# Altium PCB DingDong.PcbDoc
Units mil, origin at the board's own origin, x right, y up, seen from the top; angles counter-clockwise.
Board outline 1550 x 1690 mil, 2 copper layers (Top Layer, Bottom Layer); 15 components, 12 nets, 42 pads, 0 vias.
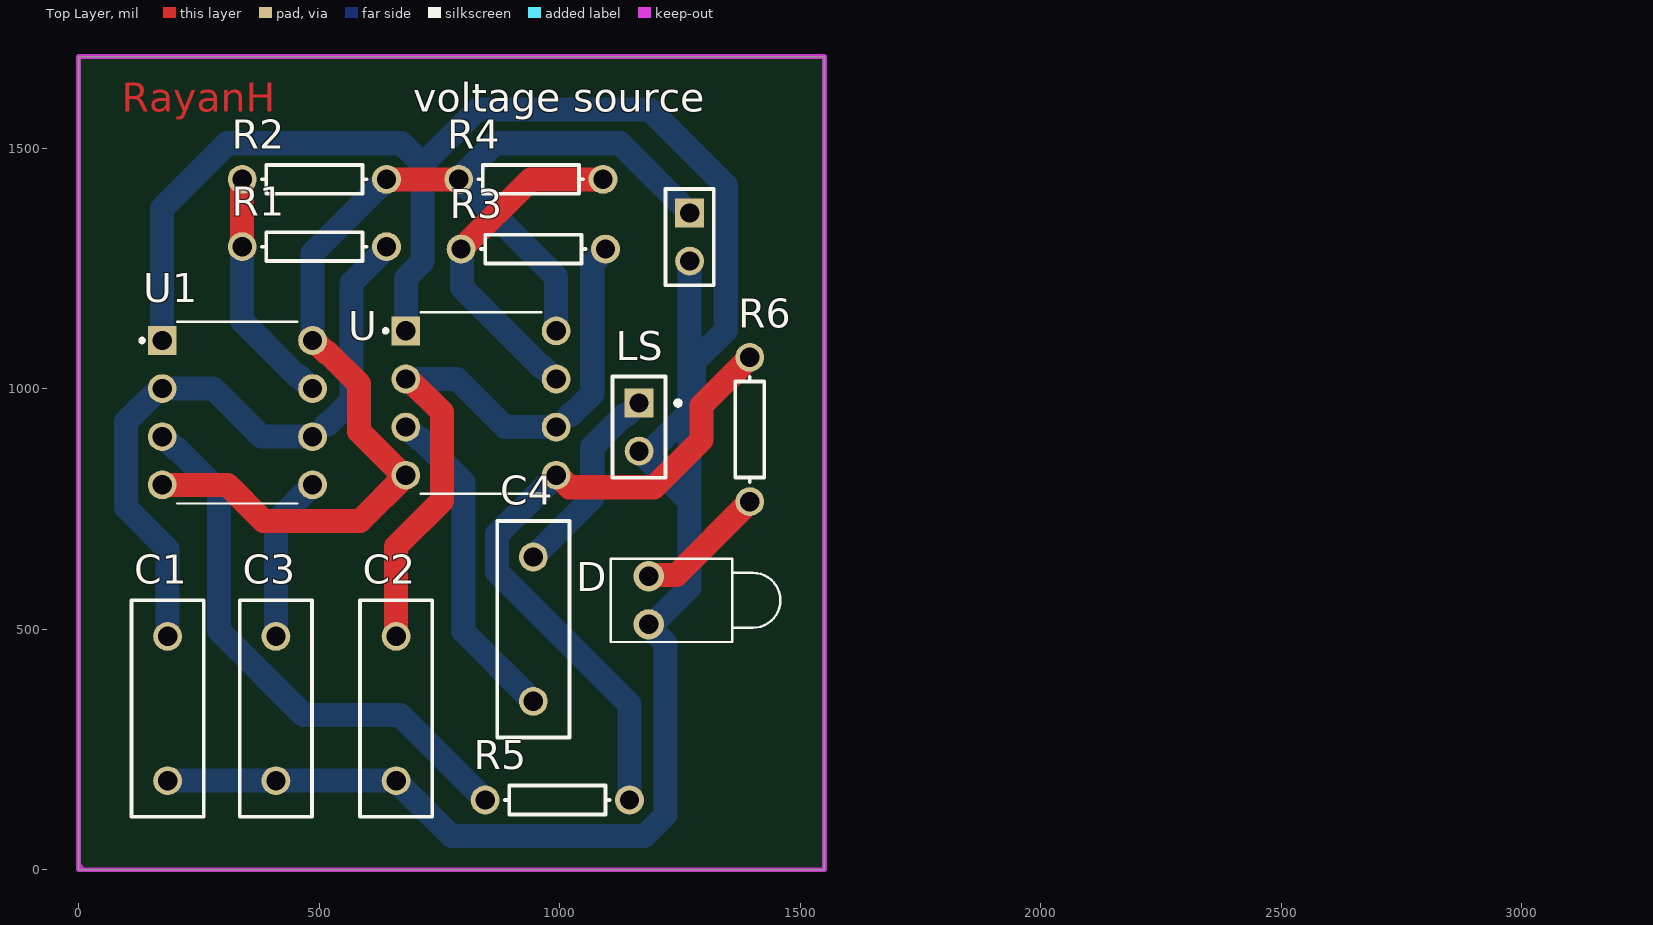
[diagram p0: Top Layer view]
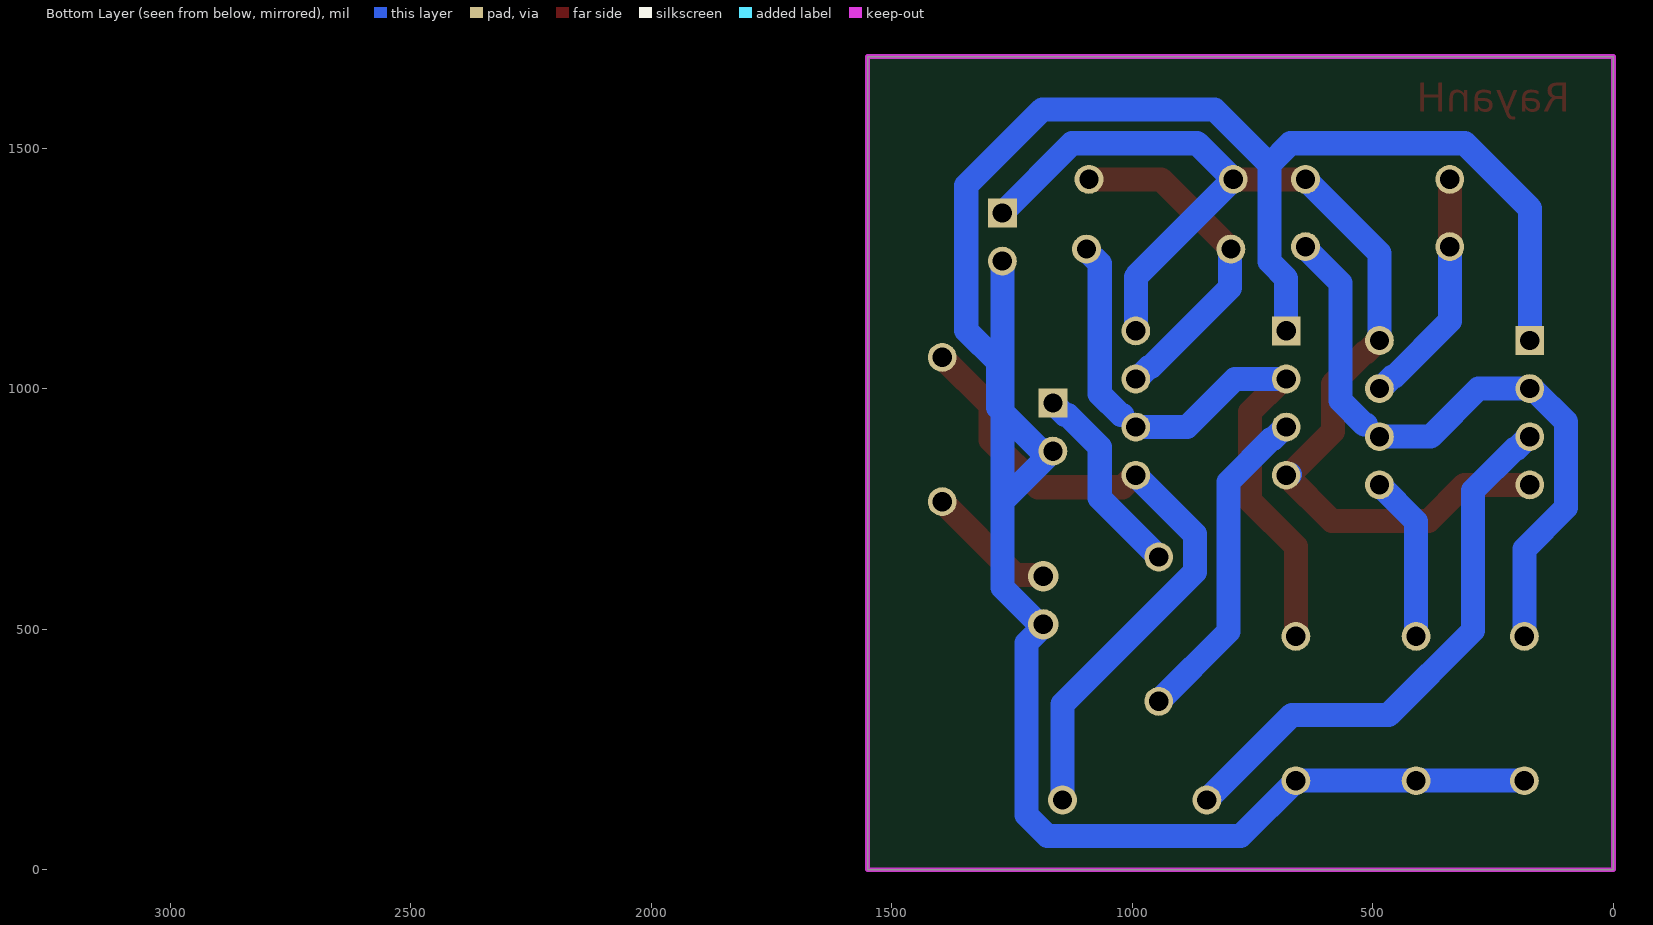
[diagram p1: Bottom Layer view, seen from below]

## Layer stack, top to bottom
Top Solder: solder mask 0.4, Solder Resist, Dk 3.5
Top Layer: signal copper 1.4
Dielectric 1: dielectric 12.6, FR-4, Dk 4.8
Bottom Layer: signal copper 1.4
Bottom Solder: solder mask 0.4, Solder Resist, Dk 3.5

## Board outline
0,0 1550,0 1550,1690 0,1690

## Design rules (kind name [scope] priority, off if disabled: settings)
BoardOutlineClearance [All] p1: gap=12 ignorepadtopadclearanceinfootprint=FALSE
Clearance [All] p1: gap=20 ignorepadtopadclearanceinfootprint=TRUE except(24: Arc-Via Track-Via SMDPad-Via THPad-Via Via-Via Via-Fill Via-Poly Via-Region Via-Text Via-Hole)
DiffPairsRouting [All] p1: maxlimit=10 minlimit=7 mostfreqgap=10 toplayer_minwidth=6 toplayer_maxwidth=15 toplayer_prefwidth=8 bottomlayer_minwidth=6 bottomlayer_maxwidth=15 bottomlayer_prefwidth=8 maxuncoupledlength=500
HoleSize [All] p1: absolutevalues=TRUE maxlimit=1000 minlimit=39.37 maxpercent=80.000 minpercent=20.000
HoleToHoleClearance [All] p1: gap=17 allowstackedmicrovias=TRUE
MinimumAnnularRing [All] p1: minimumring=17
PolygonConnect [All] p1: connectstyle=Relief reliefconductorwidth=10 reliefentries=4 polygonreliefangle="90 Angle" airgapwidth=10
RoutingVias [All] p1: holewidth=30 width=35 viastyle="Through Hole" minholewidth=10 minwidth=11 maxholewidth=255 maxwidth=250
SilkToSilkClearance [All] p1: silktosilkclearance=0
SolderMaskExpansion SolderMaskExpansion_1 [All] p1: expansion=4 istentingtop=FALSE
Width [All] p1: maxlimit=10000 minlimit=30 preferedwidth=50 minimp=50.000000 maximp=50.000000 favimp=50.000000
26 further rules are at their usual default settings.

## Components (designator, comment, footprint, x,y, rotation, side; value= is the part's Value field where it differs from the comment)
C1 "Cap" RAD-0.3 185,335 r90 top value=47uF
C2 "Cap" RAD-0.3 660,335 r90 top value=0.1uF
C3 "Cap" RAD-0.3 410,335 r90 top value=0.01uF
C4 "Cap" RAD-0.3 945,500 r90 top value=1uF
D "LED1" LED-1 1185,560 r0 top
LS "Speaker" PIN2 1165,970 r270 top
R1 "Res1" AXIAL-0.3 490,1295 r180 top value=47k
R2 "Res1" AXIAL-0.3 490,1435 r0 top value=2.2k
R3 "Res1" AXIAL-0.3 945,1290 r180 top value=100k
R4 "Res1" AXIAL-0.3 940,1435 r180 top value=2.2k
R5 "Res1" AXIAL-0.3 995,145 r0 top value=100k
R6 "Res1" AXIAL-0.3 1395,915 r90 top value=1K
U "NE555P" DIP794W45P254L959H508Q8 836.3,970 r0 top
U1 "NE555P" DIP794W45P254L959H508Q8 330,950 r0 top
"voltage source" "Header 2" HDR1X2 1270,1365 r270 top

## Footprints (in the part's own frame and the unit in brackets; to place one, negate y for a bottom-side part, rotate by r counter-clockwise, add the part's x,y. Pads: shape width x height; smd on the part's side, far side on the other; paste and mask are expansions set on the pad)
AXIAL-0.3 [mil] "Axial Device, Thru-Hole; 2 Leads; 0.3 in Pin Spacing"
  round 60 hole 40: 1(-150,0) 2(150,0)
  silkscreen extent -109,-30 109,30
DIP794W45P254L959H508Q8 [mil]
  rect 60x60 hole 40: 1(-156.3,150)
  round 60 hole 40: 2(-156.3,50) 3(-156.3,-50) 4(-156.3,-150) 5(156.3,-150) 6(156.3,-50) 7(156.3,50) 8(156.3,150)
  silkscreen extent -202,-189 125,189
HDR1X2 [mil] "Connector; Header; 2 Position"
  rect 60x60 hole 40: 1(0,0)
  round 60 hole 40: 2(100,0)
  silkscreen extent -50,-50 150,50
LED-1 [mm] "LED; 2 Leads"
  round 1.6 hole 1.016: 1(0,1.27) 2(0,-1.27)
  silkscreen extent -2,-2.2 6.95,2.2
PIN2 [mil] "Photosensitive Diode; 2 Leads"
  rect 60x60 hole 40: 1(0,0)
  round 60 hole 40: 2(100,0)
  silkscreen extent -55,-55 155,86
RAD-0.3 [mil] "Radial Cap, Thru-Hole; 2 Leads; 0.3 in Pin Spacing"
  round 60 hole 40: 1(-150,0) 2(150,0)
  silkscreen extent -225,-75 225,75

## Part data
C1 C2 C3 C4: "Capacitor", LatestRevisionDate=17-Jul-2002, LatestRevisionNote="Re-released for DXP Platform.", PackageDescription="Radial Cap, Thru-Hole; 2 Leads; 0.3 in Pin Spacing", PackageReference=RAD-0.3, Published=8-Jun-2000, Publisher="Altium Limited"
D: "Typical RED GaAs LED", LatestRevisionDate=08-Jul-2005, LatestRevisionNote="Mech Layer 1 removed.", PackageDescription="LED; 2 Leads", PackageReference=LED-1, Published=8-Jun-2000, Publisher="Altium Limited"
LS: "Loudspeaker", LatestRevisionDate=17-Jul-2002, LatestRevisionNote="Re-released for DXP Platform.", PackageReference=PIN2, Published=24-Mar-1999, Publisher="Altium Limited"
R1 R2 R3 R4 R5 R6: "Resistor", LatestRevisionDate=17-Jul-2002, LatestRevisionNote="Re-released for DXP Platform.", PackageDescription="Axial Device, Thru-Hole; 2 Leads; 0.3 in Pin Spacing", PackageReference=AXIAL-0.3, Published=8-Jun-2000, Publisher="Altium Limited"
U U1: "Single Precision Timer", Package="PDIP-8 Texas Instruments", Arrow_Electronics-Purchase-URL=https://snapeda.com/shop?store=Arrow+Electronics&id=2776400, DigiKey-Purchase-URL=https://snapeda.com/shop?store=DigiKey&id=2776400, MF="Texas Instruments", Mouser-Purchase-URL=https://snapeda.com/shop?store=Mouser&id=2776400, MP=NE555P, SnapEDA_Link=https://www.snapeda.com/parts/NE555P/Texas%20Instruments/view-part/2776400/?ref=snap, Texas_Instruments-Purchase-URL=https://snapeda.com/shop?store=Texas+Instruments&id=2776400
"voltage source": "Header, 2-Pin", LatestRevisionDate=17-Jul-2002, LatestRevisionNote="Re-released for DXP Platform.", Publisher="Altium Limited"

## Nets (pads, with @x,y where several pads share a name; then routed paths per layer and width w, separated by ;. In a path a pad name is that pad's centre, name@x,y a point inside that pad or via, vN(x,y) a via of type N, cw(c..) or ccw(c..) an arc to the next point about the centre after c; other vN are vias at no path point)
GND: "voltage source.2" C1.1 C2.1 C3.1 D.2 LS.2 U1.1 U.1 | length 5076.7
  Bottom Layer w50: U1.1 173.7,1374.77 308.93,1510 671.07,1510 715,1466.07 ; C1.1 C3.1 C2.1 775,70 1176.07,70 1220,113.93 1220,471.48 1185,506.48 D.2 1187.49,512.49 1195.67,512.49 1270,586.82 1270,951.36 ; U.1 680,1228.93 715,1263.93 715,1466.07 ; 1261.5,773.5 LS.2 1166.91,871.91 1190.55,871.91 1270,951.36 ; 1270,1265 1270,951.36 ; 715,1466.07 828.93,1580 1186.92,1580 1345,1421.92 1345,1121.07 1279.32,1055.39 1279.32,960.68 1270,951.36
NetC1_2: C1.2 R1.1 U1.2 U1.6 | length 1363.5
  Bottom Layer w50: C1.2 185,666.24 98.7,752.54 98.7,931.07 165.72,998.09 171.79,998.09 U1.2 280,1000 380,900 U1.6 ; 514.01,925 517.37,925 567.38,975.01 567.38,1219.67 640,1292.29 R1.1
NetC2_2: C2.2 R3.1 U.2 U.6 | length 1340.9
  Top Layer w50: C2.2 660,671.89 755,766.89 755,951.07 687.98,1018.09 681.91,1018.09 U.2
  Bottom Layer w50: U.2 786.3,1020 886.3,920 U.6 ; 1020.3,945 1023.66,945 1067.6,988.93 1067.6,1259.89 1095,1287.29 R3.1
NetC3_2: C3.2 U1.5 | length 346.6
  Bottom Layer w50: C3.2 410,723.7 U1.5
NetC4_1: C4.1 U.3 | length 683.3
  Bottom Layer w50: U.3 682.71,920 707.71,895 711.07,895 800,806.07 800,495 C4.1
NetC4_2: C4.2 LS.1 | length 414.7
  Bottom Layer w50: C4.2 1067.6,772.6 1067.6,878.66 1133.93,945 1140,945 LS.1
NetD_1: D.1 R6.1 | length 274.2
  Top Layer w50: D.1 1187.49,612.49 1242.49,612.49 R6.1
NetR1_2: R1.2 R2.1 U1.7 | length 499.2
  Top Layer w50: R1.2 R2.1
  Bottom Layer w50: R1.2 340,1140.23 455.23,1025 458.59,1025 483.59,1000 U1.7
NetR2_2: "voltage source.1" R2.2 R4.2 U1.4 U1.8 U.4 U.8 | length 2474.2
  Top Layer w50: U1.4 309.39,800 384.39,725 585,725 U.4 678.09,821.91 672.02,821.91 583.15,910.78 583.15,1009.22 517.37,1075 514.01,1075 489.01,1100 U1.8 ; R2.2 R4.2
  Bottom Layer w50: U1.8@489.01,1100 U1.8 486.3,1281.3 R2.2 ; U.4@672.02,821.91 678.09,821.91 U.4 ; U.8 992.6,1232.4 R4.2 865,1510 1125,1510 1270,1365
NetR3_2: R3.2 R4.1 U.7 | length 710.5
  Top Layer w50: R3.2 940,1435 R4.1
  Bottom Layer w50: R3.2 796.91,1288.09 796.91,1209.62 961.53,1045 964.89,1045 989.89,1020 U.7
NetR5_1: R5.1 U1.3 | length 1154.4
  Bottom Layer w50: U1.3 176.41,900 201.41,875 204.77,875 291.85,787.92 291.85,497.08 466.94,322 668,322 R5.1
NetR5_2: R5.2 R6.2 U.5 | length 1405.9
  Top Layer w50: U.5 995.3,820 1020.3,795 1196.07,795 1294.58,893.51 1294.58,964.58 R6.2
  Bottom Layer w50: U.5 870,697.4 870,618.93 1145,343.93 R5.2

## Keep-outs
Top Layer:
  lines w10: 5,5 0,10 10,0
Keep-Out Layer:
  the board outline again, w10

## Other copper
Top Layer:
  region: 3190,285
  region: 3190,285
  text "RayanH" at 90,1574.99 h60